# Altium PCB EMIRemover.PcbDoc
Units mm, origin at the board's own origin, x right, y up, seen from the top; angles counter-clockwise.
Board outline 158 x 45 mm, 2 copper layers (Top Layer, Bottom Layer); 16 components, 10 nets, 42 pads, 0 vias.
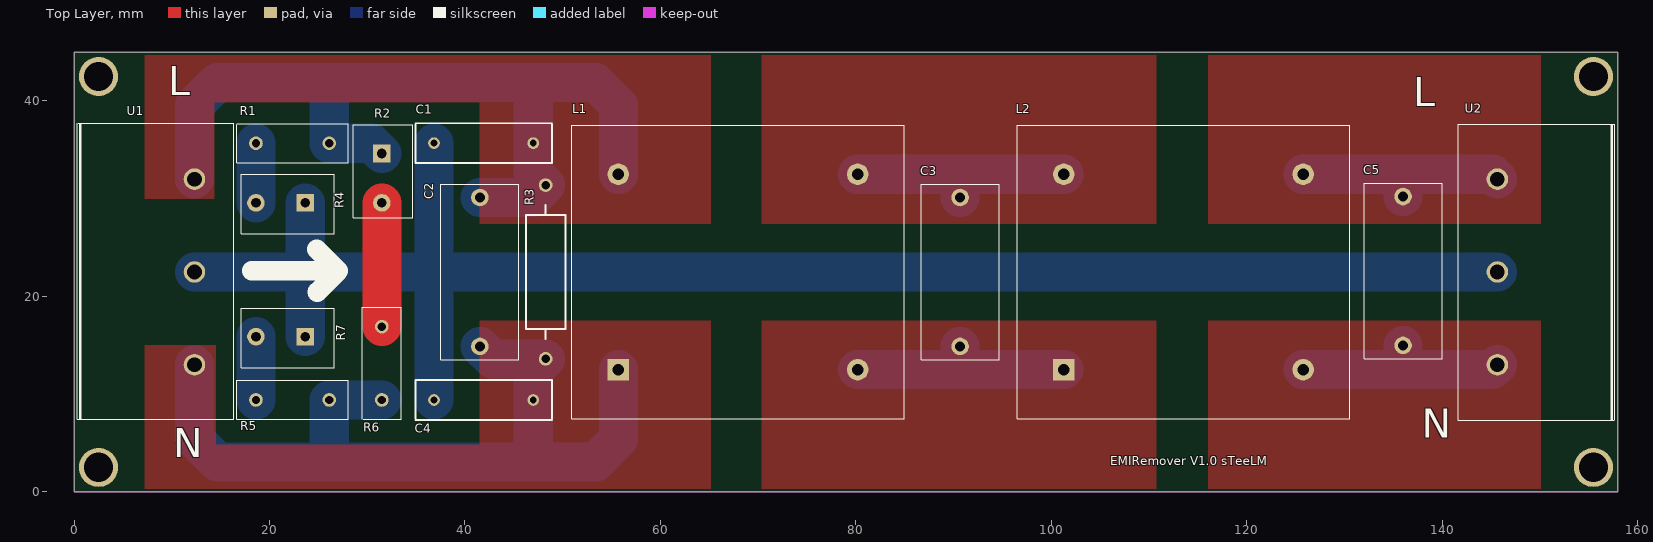
[diagram p0: Top Layer view]
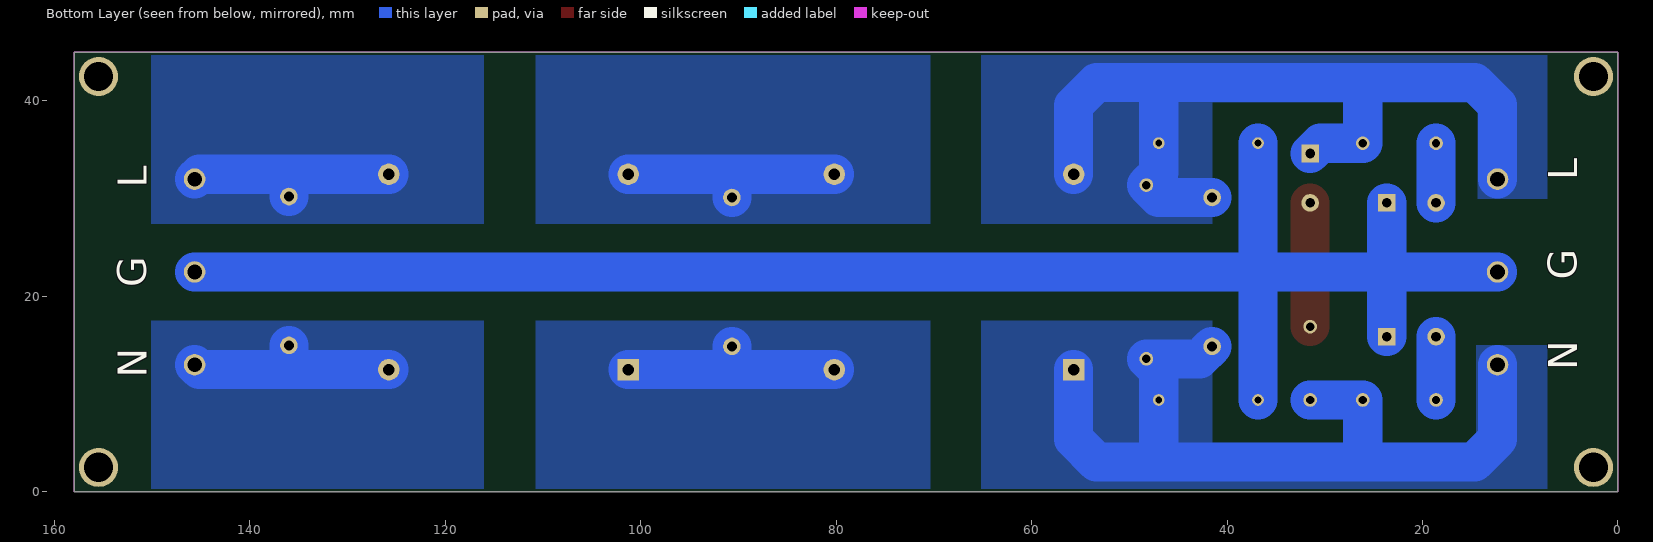
[diagram p1: Bottom Layer view, seen from below]

## Layer stack, top to bottom
Top Solder: solder mask 0.0102, Solder Resist, Dk 3.5
Top Layer: signal copper 0.0356
Dielectric 1: dielectric 0.32, FR-4, Dk 4.8
Bottom Layer: signal copper 0.0356
Bottom Solder: solder mask 0.0102, Solder Resist, Dk 3.5

## Board outline
0,0 0,45 158,45 158,0

## Design rules (kind name [scope] priority, off if disabled: settings)
Clearance [All] p1: gap=0.254 ignorepadtopadclearanceinfootprint=FALSE
HoleSize [All] p1: absolutevalues=TRUE maxlimit=3 minlimit=0.025 maxpercent=80.000 minpercent=20.000
PolygonConnect [All] p1: connectstyle=Direct reliefconductorwidth=0.254 reliefentries=4 polygonreliefangle="90 Angle" airgapwidth=0.254
RoutingVias [All] p1: holewidth=0.711 width=1.27 viastyle="Through Hole" minholewidth=0.711 minwidth=1.27 maxholewidth=0.711 maxwidth=1.27
SolderMaskExpansion [All] p1: expansion=0.102 istentingtop=FALSE
SupplyNets "Schematic Supply Nets" [InNet('GND')] p1: voltage=0.000
Width [All] p1: maxlimit=4 minlimit=0.254 preferedwidth=0.254
29 further rules are at their usual default settings.

## Components (designator, comment, footprint, x,y, rotation, side; value= is the part's Value field where it differs from the comment)
C1 "400V" RAD-0.4 41.91,35.687 r180 top value=472
C2 "275V" CAPCDSPC 41.529,22.5 r270 top value=474
C3 "275V" CAPCDSPC 90.678,22.5 r270 top value=474
C4 "400V" RAD-0.4 41.91,9.4 r0 top value=472
C5 "275V" CAPCDSPC 136.017,22.6 r270 top value=474
L1 "SQ3324/15A/10mH" SQ3324 67.945,22.5 r0 top locked
L2 "SQ3324/15A/10mH" SQ3324 113.538,22.5 r0 top
R1 "10D431K" 10D431K 22.36,35.673 r180 top
R2 "B5G600L" B5G600L 31.496,32.62 r270 top
R3 "2W" AXIAL-0.7 48.26,22.5 r270 top value=560K
R4 "B5G600L" B5G600L 21.658,29.572 r180 top
R5 "10D431K" 10D431K 22.36,9.4 r0 top
R6 "10D431K" 10D431K 31.496,13.15 r270 top
R7 "B5G600L" B5G600L 21.658,15.875 r180 top
U1 "HB9500-3P" HB9500-3P 12.319,22.5 r90 top
U2 "HB9500-3P" HB9500-3P 145.669,22.5 r270 top locked

## Footprints (in the part's own frame and the unit in brackets; to place one, negate y for a bottom-side part, rotate by r counter-clockwise, add the part's x,y. Pads: shape width x height; smd on the part's side, far side on the other; paste and mask are expansions set on the pad)
10D431K [mm] "10D431K"
  round 1.4 hole 0.85: 1(-3.75,0) 2(3.75,0)
  silkscreen extent -5.71,-2 5.71,2
AXIAL-0.7 [mm] "Axial Device, Thru-Hole; 2 Leads; 0.7 in Pin Spacing"
  round 1.4 hole 0.85: 1(-8.89,0) 2(8.89,0)
  silkscreen extent -6.86,-2.03 6.86,2.03, body extent -7.35,-2.41 7.35,2.39, height 4.9
B5G600L [mm] "B5G600L"
  rect 1.8x1.8 hole 1: 1(-2,0)
  round 1.8 hole 1: 2(3.048,0)
  silkscreen extent -4.95,-2.92 4.57,3.18, body extent -4.9,-2.95 1.09,3.05, height 10
CAPCDSPC [mm] "Cap CDSPC"
  round 1.8 hole 1: 1(-7.62,0) 2(7.62,0)
  silkscreen extent -9,-4 9,4
HB9500-3P [mm] "HB9500-3P"
  round 2.2 hole 1.5: 1(9.5,0) 2(0,0) 3(-9.5,0)
  silkscreen extent -15.1,-4 15.2,12, body extent -15.11,-3.94 15.11,11.68, height 15
RAD-0.4 [mm] "Radial Cap, Thru-Hole; 2 Leads; 0.4 in Pin Spacing"
  round 1.2 hole 0.7: 1(-5.08,0) 2(5.08,0)
  silkscreen extent -6.98,-2.03 6.98,2.03
SQ3324 [mm] "SQ3324"
  rect 2.2x2.2 hole 1.2: 1(-12.25,-10)
  round 2.2 hole 1.2: 2(12.25,-10) 3(-12.25,10) 4(12.25,10)
  silkscreen extent -17,-15 17,15, body extent -17.02,-14.99 17.02,14.99, height 22.5

## Part data
C1 C2 C3 C4 C5: library part Cap, "Capacitor", LatestRevisionDate=17-Jul-2002, LatestRevisionNote="Re-released for DXP Platform.", PackageDescription="Radial Cap, Thru-Hole; 2 Leads; 0.3 in Pin Spacing", PackageReference=RAD-0.3, Published=8-Jun-2000, Publisher="Altium Limited"
L1 L2: library part SQ3324, "SQ3324"
R3: library part Res1, "Resistor", LatestRevisionDate=17-Jul-2002, LatestRevisionNote="Re-released for DXP Platform.", PackageDescription="Axial Device, Thru-Hole; 2 Leads; 0.3 in Pin Spacing", PackageReference=AXIAL-0.3, Published=8-Jun-2000, Publisher="Altium Limited"

## Free pads (board coordinates)
  round 4 hole 3 mask+0.102: 0(2.5,2.5) 0(2.5,42.5) 0(155.5,2.5) 0(155.5,42.5)

## Nets (pads, with @x,y where several pads share a name; then routed paths per layer and width w, separated by ;. In a path a pad name is that pad's centre, name@x,y a point inside that pad or via, vN(x,y) a via of type N, cw(c..) or ccw(c..) an arc to the next point about the centre after c; other vN are vias at no path point)
GND: C1.2 C4.1 R4.1 R7.1 U1.2 U2.2 | length 173.3
  Bottom Layer w4: U1.2 23.658,22.5 ; R7.1 23.658,22.5 ; R4.1 23.658,22.5 ; C4.1 36.83,22.5 ; C1.2 36.83,22.5 ; U2.2 36.83,22.5 ; 23.658,22.5 36.83,22.5
NetC1_1: C1.1 C2.1 L1.3 R1.1 R2.1 R3.1 U1.1 | length 90.4
  Bottom Layer w4: U1.1 12.319,39.567 14.662,41.91 26.035,41.91 ; R2.1 30.443,35.673 R1.1 26.11,41.835 26.035,41.91 ; C2.1 46.99,30.12 R3.1 46.99,32.66 C1.1 46.99,41.783 46.863,41.91 ; L1.3 55.695,39.555 53.34,41.91 46.863,41.91 ; 26.035,41.91 46.863,41.91
NetC2_2: C2.2 C4.2 L1.1 R3.2 R5.2 R6.2 U1.3 | length 90.3
  Bottom Layer w4: U1.3 12.319,5.391 14.662,3.048 26.035,3.048 ; R6.2 R5.2 26.11,3.123 26.035,3.048 ; C2.2 42.799,13.61 R3.2 46.99,12.34 C4.2 46.99,3.302 47.244,3.048 ; L1.1 55.695,5.391 53.352,3.048 47.244,3.048 ; 26.035,3.048 47.244,3.048
NetC3_1: C3.1 L1.4 L2.3 | length 23.3
  Bottom Layer w4: L1.4 L2.3 ; C3.1 90.678,32.373
NetC3_2: C3.2 L1.2 L2.1 | length 23.5
  Bottom Layer w4: L1.2 90.678,12.5 ; C3.2 90.678,12.5 ; L2.1 90.678,12.5
NetC5_1: C5.1 L2.4 U2.3 | length 22.4
  Bottom Layer w4: L2.4 136.017,32.5 ; C5.1 136.017,32.5 ; U2.3 145.169,32.5 136.017,32.5
NetC5_2: C5.2 L2.2 U2.1 | length 22.5
  Bottom Layer w4: L2.2 136.017,12.5 ; C5.2 136.017,12.627 136.144,12.5 145.169,12.5 U2.1
NetR1_2: R1.2 R4.2 | length 6.1
  Bottom Layer w4: R4.2 R1.2
NetR2_2: R2.2 R6.1 | length 12.7
  Top Layer w4: R6.1 R2.2
NetR5_1: R5.1 R7.2 | length 6.5
  Bottom Layer w4: R5.1 R7.2

## Polygon pours and split planes (outlines as drawn)
NetC2_2 on Bottom Layer (solid, remove dead copper, pour order 10): 7.239,0 7.239,14.986 14.478,14.986 14.478,4.826 41.529,4.826 41.529,17.526 65.151,17.526 65.151,0
NetC1_1 on Bottom Layer "Bottom Layer-NetC1_1" (solid, remove dead copper, pour order 8): 7.239,29.972 7.239,44.958 65.151,44.958 65.151,27.432 41.529,27.432 41.529,39.878 14.351,39.878 14.351,29.972
NetC3_2 on Bottom Layer "Bottom Layer-NetC3_2" (solid, remove dead copper, pour order 6): 70.358,0 110.744,0 110.744,11.239 110.744,17.526 70.358,17.526
NetC3_1 on Bottom Layer "Bottom Layer-NetC3_1" (solid, remove dead copper, pour order 5): 70.358,27.432 70.358,44.958 110.744,44.958 110.744,27.432
NetC5_2 on Bottom Layer "Bottom Layer-No Net" (solid, remove dead copper, pour order 3): 116.078,0 116.078,17.526 150.114,17.526 150.114,0
NetC5_1 on Bottom Layer "Bottom Layer-NetC5_1" (solid, remove dead copper, pour order 0): 116.078,27.432 116.078,44.958 150.114,44.958 150.114,27.432
NetC2_2 on Top Layer (solid, remove dead copper, pour order 11): 7.239,0 7.239,14.986 14.478,14.986 14.478,4.826 41.529,4.826 41.529,17.526 65.151,17.526 65.151,0
NetC1_1 on Top Layer "Top Layer-NetC1_1" (solid, remove dead copper, pour order 9): 7.239,29.972 7.239,44.958 65.151,44.958 65.151,27.432 41.529,27.432 41.529,39.878 14.351,39.878 14.351,29.972
NetC3_2 on Top Layer "Top Layer-NetC3_2" (solid, remove dead copper, pour order 7): 70.358,0 110.744,0 110.744,11.239 110.744,17.526 70.358,17.526
NetC3_1 on Top Layer "Top Layer-NetC3_1" (solid, remove dead copper, pour order 4): 70.358,27.432 70.358,44.958 110.744,44.958 110.744,27.432
NetC5_2 on Top Layer "Bottom Layer-No Net 1" (solid, remove dead copper, pour order 2): 116.078,0 116.078,17.526 150.114,17.526 150.114,0
NetC5_1 on Top Layer "Top Layer-NetC5_1" (solid, remove dead copper, pour order 1): 116.078,27.432 116.078,44.958 150.114,44.958 150.114,27.432

## Keep-outs
Keep-Out Layer:
  the board outline again, w0.127

## Silkscreen, mask and mechanical layers (free items; w line width, h text height)
Top Overlay:
  lines w2: 18.161,22.606 27.051,22.606 ; 24.828,24.828 27.051,22.606 ; 24.892,20.447 27.051,22.606
  text "L" at 9.652,39.624 h5.08
  text "L" at 137.033,38.481 h5.08
  text "N" at 137.922,4.572 h5.08
  text "N" at 10.16,2.54 h5.08
  text "EMIRemover V1.0 sTeeLM" at 106.045,2.429 h1.52
Bottom Overlay:
  text "L" at 3.175,31.877 h5.08 r270
  text "L" at 149.606,31.115 h5.08 r270
  text "G" at 3.228,21.717 h5.08 r270
  text "G" at 149.659,20.955 h5.08 r270
  text "N" at 3.175,12.446 h5.08 r270
  text "N" at 149.606,11.684 h5.08 r270
Top Solder:
  lines w4: 31.496,16.9 31.496,29.572
Bottom Solder:
  lines w0.254: 41.529,14.88 41.635,14.88 ; 46.99,32.66 48.271,31.38 ; 48.26,12.319 48.26,13.61 ; 90.678,30.12 90.678,32.131 ; 136.017,12.192 136.017,14.98 ; 145.149,32.5 145.169,32.5 145.669,32 145.673,32 ; 145.169,12.5 145.669,13 145.842,13
  lines w4: 12.319,13 12.319,5.461 14.732,3.048 53.467,3.048 55.695,5.276 55.695,12.5 ; 12.319,22.5 145.669,22.5 ; 12.319,32 12.319,39.497 14.732,41.91 53.213,41.91 55.695,39.428 55.695,32.5 ; 18.61,9.4 18.61,15.875 ; 18.61,29.572 18.61,35.673 ; 23.658,15.875 23.658,29.572 ; 26.11,3.227 26.11,9.4 31.496,9.4 ; 26.11,41.477 26.11,35.673 30.443,35.673 31.496,34.62 ; 36.83,9.4 36.83,35.687 ; 41.529,30.12 47.011,30.12 48.271,31.38 ; 41.635,14.88 42.418,14.097 42.434,14.097 42.921,13.61 48.26,13.61 ; 46.99,3.683 46.99,6.733 46.99,11.557 ; 46.99,32.66 46.99,35.687 46.99,41.656 ; 80.195,12.5 101.288,12.5 ; 80.195,32.5 101.288,32.5 ; 90.678,12.564 90.678,14.88 ; 90.678,30.12 90.678,32.437 ; 125.788,12.5 145.169,12.5 ; 125.788,32.5 145.149,32.5 ; 136.017,12.573 136.017,14.98 ; 136.017,30.22 136.017,32.512 ; 145.669,13.208 145.669,12.827 145.842,13 ; 145.673,32 145.732,31.941
Mechanical 1:
  circle w0.127: c2.5,42.5 r4
  circle w0.127: c155.5,42.5 r4
  circle w0.127: c155.5,2.5 r4
  circle w0.127: c2.5,2.5 r4
  lines w0.254: 145.669,13 145.715,13 ; 145.669,32 145.8,32 ; 7.239,0 7.239,14.986 12.319,14.986 14.478,14.986 14.478,4.826 41.529,4.826 41.529,17.526 65.151,17.526 65.151,0 7.239,0 ; 7.239,29.972 7.239,44.958 65.151,44.958 65.151,27.432 41.529,27.432 41.529,39.878 14.351,39.878 14.351,29.972 12.319,29.972 7.239,29.972 ; 70.358,0 87.884,0 110.744,0 110.744,11.239 110.744,17.526 70.358,17.526 70.358,0 ; 70.358,27.432 110.744,27.432 110.744,33.718 110.744,44.958 70.358,44.958 70.358,27.432 ; 116.078,0 116.078,17.526 150.114,17.526 150.114,0 116.078,0 ; 116.078,27.432 116.078,44.958 150.114,44.958 150.114,27.432 116.078,27.432